# Altium PCB food_box_board.PcbDoc (part 2 of 2)
Units mil, origin at the board's own origin, x right, y up, seen from the top; angles counter-clockwise.
Board outline 2685 x 2040 mil, 4 copper layers (Top Layer, Int1 (GND), Int2 (PWR), Bottom Layer), stack 53.912 mil thick; 76 components, 56 nets, 292 pads, 52 vias.
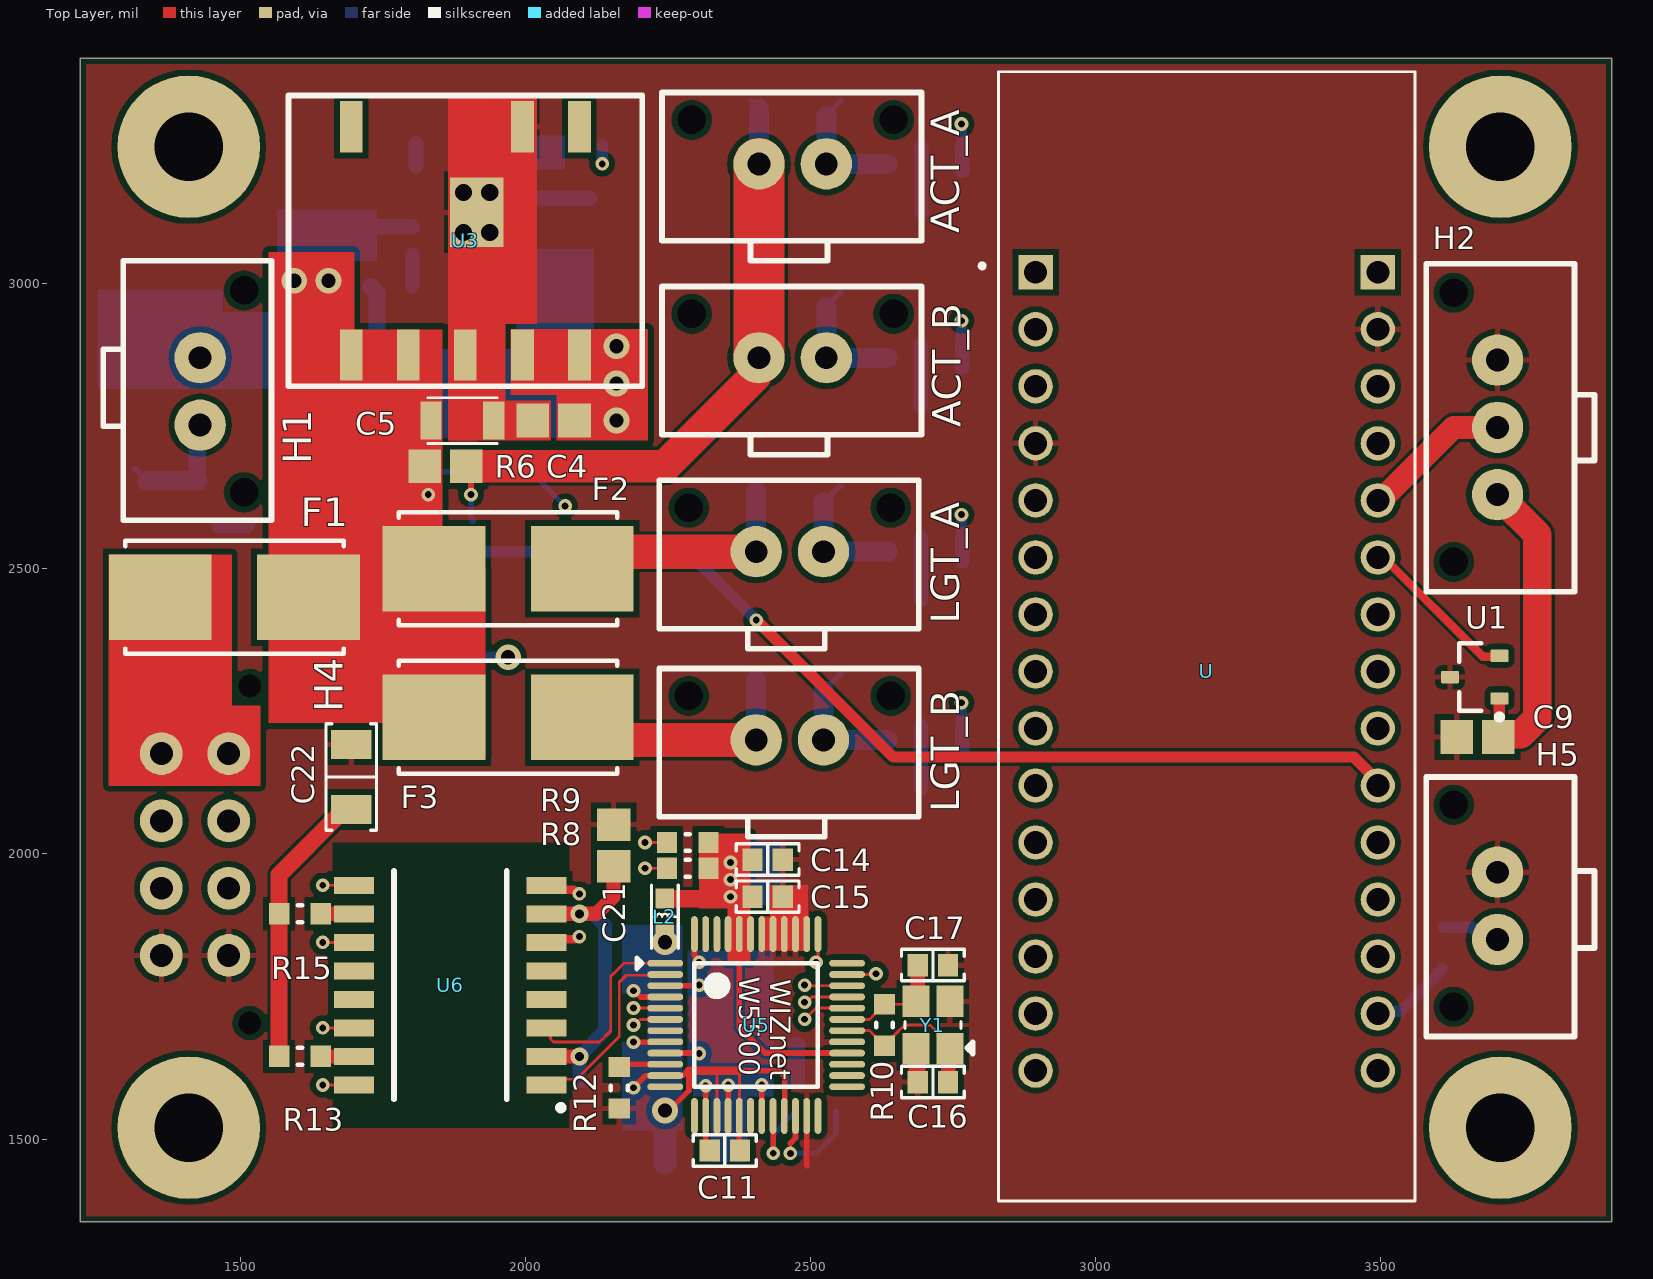
[diagram p0: Top Layer view]

## Part data (continued)
R2: "RES SMD 25.5K OHM 1% 1/10W 0603", Case Code (Imperial)=0603, Case Code (Metric)=1608, Manufacturer=Vishay, Manufacturer Part Number=CRCW060325K5FKEA, Max Operating Temperature=155°C, Max Power Dissipation=100mW, Min Operating Temperature=-55°C, Package Quantity=10, Resistance=25.5k, Supplier Part Number 1=541-25.5KHCT-ND, Temperature Coefficient=100ppm/°C, Tolerance=1%, Voltage Rating=75V, Case/Package=0603, Category="Chip SMD Resistors", ComponentLink1Description=https://datasheet.ciiva.com/11810/0900766b80d98afc-11810483.pdf?src-supplier=RSComponents, ComponentLink1URL=https://datasheet.ciiva.com/11810/0900766b80d98afc-11810483.pdf?src-supplier=RSComponents, ComponentLink2Description=https://datasheet.ciiva.com/2465/dcrcwe3-2465664.pdf?src-supplier=Digi-Key, ComponentLink2URL=https://datasheet.ciiva.com/2465/dcrcwe3-2465664.pdf?src-supplier=Digi-Key, ComponentLink3Description=https://datasheet.ciiva.com/2465/dcrcwe3-2465665.pdf?src-supplier=Digi-Key, ComponentLink3URL=https://datasheet.ciiva.com/2465/dcrcwe3-2465665.pdf?src-supplier=Digi-Key, ComponentLink4Description=https://datasheet.ciiva.com/3257/dcrcwe3-3257318.pdf?src-supplier=Avnet, ComponentLink4URL=https://datasheet.ciiva.com/3257/dcrcwe3-3257318.pdf?src-supplier=Avnet, ComponentLink5Description=https://datasheet.ciiva.com/3257/dcrcwe3-3257319.pdf?src-supplier=Avnet, ComponentLink5URL=https://datasheet.ciiva.com/3257/dcrcwe3-3257319.pdf?src-supplier=Avnet, ComponentLink6Description=https://datasheet.ciiva.com/16202/dcrcwe3-16202503.pdf?src-supplier=Future+Electronics, ComponentLink6URL=https://datasheet.ciiva.com/16202/dcrcwe3-16202503.pdf?src-supplier=Future+Electronics, ComponentLink7Description=https://datasheet.ciiva.com/7173/1635184-7173016.pdf?src-supplier=Newark, ComponentLink7URL=https://datasheet.ciiva.com/7173/1635184-7173016.pdf?src-supplier=Newark, ComponentLink8Description=https://datasheet.ciiva.com/16882/dcrcwe3-16882729.pdf?src-supplier=Avnet+Europe, ComponentLink8URL=https://datasheet.ciiva.com/16882/dcrcwe3-16882729.pdf?src-supplier=Avnet+Europe, ComponentLink9Description=https://datasheet.ciiva.com/22675/1847332-22675962.pdf?src-supplier=Element14, ComponentLink9URL=https://datasheet.ciiva.com/22675/1847332-22675962.pdf?src-supplier=Element14, ComponentLink10Description=https://datasheet.ciiva.com/22702/1697337-22702891.pdf?src-supplier=Element14, ComponentLink10URL=https://datasheet.ciiva.com/22702/1697337-22702891.pdf?src-supplier=Element14, ComponentLink11Description=https://datasheet.ciiva.com/22869/70201119-22869452.pdf?src-supplier=Allied+Electronics, ComponentLink11URL=https://datasheet.ciiva.com/22869/70201119-22869452.pdf?src-supplier=Allied+Electronics, ComponentLink12Description=https://datasheet.ciiva.com/2465/dcrcwe3-2465663.pdf?src-supplier=Digi-Key, ComponentLink12URL=https://datasheet.ciiva.com/2465/dcrcwe3-2465663.pdf?src-supplier=Digi-Key, ComponentLink13Description=https://datasheet.ciiva.com/5541/dcrcwe3-109170-5541965.pdf?src-supplier=Mouser, ComponentLink13URL=https://datasheet.ciiva.com/5541/dcrcwe3-109170-5541965.pdf?src-supplier=Mouser, Composition="Thick Film", Contact Plating=Tin, Depth=0.85mm, Features="Automotive AEC-Q200", Height=0.45mm, Lead Free="Lead Free", Length=1.55mm, Military Standard=Not, Number of Pins=2, Number of Terminations=2, Packaging="Tape and Reel", Power Rating=100mW, Pricing 1="1=0.10000, 10=0.03400, 100=0.01390, 1000=0.00623, 2500=0.00540 (USD)", Radiation Hardening=No, REACH SVHC=Unknown, Supplier 1=Digi-Key, Termination=SMD/SMT, Voltage Rating (DC)=75V, Weight=7.1E-05oz, Width=0.033inch, Working Voltage=75V
R3: "Res Thick Film 0603 13K Ohm 1% 1/10W 100ppm/C Molded SMD SMD Paper T/R", Case Code (Imperial)=0603, Case Code (Metric)=1608, Manufacturer="Vishay Dale", Manufacturer Part Number=CRCW060313K0FKTA, Max Operating Temperature=155°C, Max Power Dissipation=100mW, Min Operating Temperature=-55°C, Package Quantity=5000, Resistance=13k, Supplier Part Number 1=541-CRCW060313K0FKTACT-ND, Temperature Coefficient=100ppm/°C, Tolerance=1%, Voltage Rating=75V, Case/Package=0603, Category="Chip SMD Resistors", ComponentLink1Description=https://datasheet.ciiva.com/15159/getdatasheetpartid-33120-15159398.pdf?src-supplier=Verical, ComponentLink1URL=https://datasheet.ciiva.com/15159/getdatasheetpartid-33120-15159398.pdf?src-supplier=Verical, ComponentLink2Description=https://datasheet.ciiva.com/2564/dcrcw-2564949.pdf?src-supplier=Digi-Key, ComponentLink2URL=https://datasheet.ciiva.com/2564/dcrcw-2564949.pdf?src-supplier=Digi-Key, ComponentLink3Description=https://datasheet.ciiva.com/9043/dcrcw-9043261.pdf?src-supplier=Avnet, ComponentLink3URL=https://datasheet.ciiva.com/9043/dcrcw-9043261.pdf?src-supplier=Avnet, Composition="Thick Film", Contact Plating=Tin,Lead, Depth=0.85mm, Features="Automotive AEC-Q200", Height=0.02inch, Lead Free="Contains Lead", Length=1.55mm, Military Standard=Not, Number of Pins=2, Number of Terminations=2, Packaging="Tape and Reel", Power Dissipation=100mW, Power Rating=100mW, Pricing 1="1=0.13000, 10=0.12000, 100=0.04620, 1000=0.02033, 2500=0.01756 (USD)", Radiation Hardening=No, REACH SVHC=Unknown, Supplier 1=Digi-Key, Voltage Rating (DC)=75V, Weight=7.1E-05oz, Width=0.85mm
R4 "R11_Box Actuator A" "R11_Box Actuator B" "R11_Light A" "R11_Light B": library part "RES 0603", "CRGCQ 0603 100R 5%", Case Code (Imperial)=0603, Case Code (Metric)=1608, Manufacturer="TE Connectivity", Manufacturer Part Number=CRGCQ0603J100R, Max Operating Temperature=155°C, Max Power Dissipation=100mW, Min Operating Temperature=-55°C, Resistance=100R, Supplier Part Number 1=A130085CT-ND, Temperature Coefficient=100ppm/°C, Tolerance=5%, Case/Package=0603, Category="Chip SMD Resistors", ComponentLink1Description=https://www.te.com/commerce/DocumentDelivery/DDEController?Action=srchrtrv&amp;DocNm=1773204-3&amp;DocType=DS&amp;DocLang=English&src-supplier=Digi-Key, ComponentLink1URL=https://www.te.com/commerce/DocumentDelivery/DDEController?Action=srchrtrv&amp;DocNm=1773204-3&amp;DocType=DS&amp;DocLang=English&src-supplier=Digi-Key, Composition="Thick Film", Features="Moisture Resistant,Automotive AEC-Q200", Number of Terminations=2, Packaging="Cut Tape", Pricing 1="1=0.10000, 10=0.02100, 100=0.00860, 1000=0.00387, 2500=0.00336 (USD)", Supplier 1=Digi-Key
R5 "R14_Box Actuator A" "R14_Box Actuator B" "R14_Light A" "R14_Light B": library part "RES 0603", "TE CONNECTIVITY - CRGCQ0603J10K - RES, 10K, 5%, 0603, THICK FILM", Case Code (Imperial)=0603, Case Code (Metric)=1608, Manufacturer="TE Connectivity", Manufacturer Part Number=CRGCQ0603J10K, Max Operating Temperature=155°C, Max Power Dissipation=100mW, Min Operating Temperature=-55°C, Resistance=10kR, Supplier Part Number 1=A130097CT-ND, Temperature Coefficient=100ppm/°C, Tolerance=5%, Case/Package=0603, Category="Chip SMD Resistors", ComponentLink1Description=https://4donline.ihs.com/images/VipMasterIC/IC/TYEL/TYEL-S-A0004929575/TYEL-S-A0004929575-1.pdf?hkey=52A5661711E402568146F3353EA87419&src-supplier=Farnell, ComponentLink1URL=https://4donline.ihs.com/images/VipMasterIC/IC/TYEL/TYEL-S-A0004929575/TYEL-S-A0004929575-1.pdf?hkey=52A5661711E402568146F3353EA87419&src-supplier=Farnell, ComponentLink2Description=https://4donline.ihs.com/images/VipMasterIC/IC/TYEL/TYEL-S-A0004929575/TYEL-S-A0004929575-1.pdf?hkey=52A5661711E402568146F3353EA87419&src-supplier=Newark, ComponentLink2URL=https://4donline.ihs.com/images/VipMasterIC/IC/TYEL/TYEL-S-A0004929575/TYEL-S-A0004929575-1.pdf?hkey=52A5661711E402568146F3353EA87419&src-supplier=Newark, ComponentLink3Description=https://www.te.com/commerce/DocumentDelivery/DDEController?Action=srchrtrv&amp;DocNm=1773204-3&amp;DocType=DS&amp;DocLang=English&src-supplier=Digi-Key, ComponentLink3URL=https://www.te.com/commerce/DocumentDelivery/DDEController?Action=srchrtrv&amp;DocNm=1773204-3&amp;DocType=DS&amp;DocLang=English&src-supplier=Digi-Key, ComponentLink4Description=http://www.te.com/commerce/DocumentDelivery/DDEController?Action=srchrtrv&DocNm=1773204-3&DocType=DS&DocLang=English&src-supplier=Digi-Key, ComponentLink4URL=http://www.te.com/commerce/DocumentDelivery/DDEController?Action=srchrtrv&DocNm=1773204-3&DocType=DS&DocLang=English&src-supplier=Digi-Key, Composition="Thick Film", Features="Moisture Resistant,Automotive AEC-Q200", Number of Terminations=2, Packaging="Tape and Reel", Pricing 1="1=0.10000, 10=0.02100, 100=0.00860, 1000=0.00387, 2500=0.00336 (USD)", Supplier 1=Digi-Key
R6: library part "RES 0603", "Resistor Thick Film 0.01Ohm 0.5% 0.5W 2-Pin 0805 T/R", Manufacturer=Panasonic, Manufacturer Part Number=ERJ-6CWDR010V, Supplier Part Number 1=P124401CT-ND, Pricing 1="1=0.65000, 10=0.48100, 25=0.39000, 50=0.33920, 100=0.27990, 250=0.24312, 500=0.19790, 1000=0.15696 (USD)", Supplier 1=Digi-Key
R7: library part "RES 0603", "CRGCQ 0603 100K 5%", Case Code (Imperial)=0603, Case Code (Metric)=1608, Manufacturer="TE Connectivity", Manufacturer Part Number=CRGCQ0603J100K, Max Operating Temperature=155°C, Max Power Dissipation=100mW, Min Operating Temperature=-55°C, Resistance=100k, Supplier Part Number 1=A130103CT-ND, Temperature Coefficient=100ppm/°C, Tolerance=5%, Case/Package=0603, Category="Chip SMD Resistors", ComponentLink1Description=https://www.te.com/commerce/DocumentDelivery/DDEController?Action=srchrtrv&amp;DocNm=1773204-3&amp;DocType=DS&amp;DocLang=English&src-supplier=Digi-Key, ComponentLink1URL=https://www.te.com/commerce/DocumentDelivery/DDEController?Action=srchrtrv&amp;DocNm=1773204-3&amp;DocType=DS&amp;DocLang=English&src-supplier=Digi-Key, ComponentLink2Description=https://4donline.ihs.com/images/VipMasterIC/IC/TYEL/TYEL-S-A0004929575/TYEL-S-A0004929575-1.pdf?hkey=52A5661711E402568146F3353EA87419&src-supplier=Farnell, ComponentLink2URL=https://4donline.ihs.com/images/VipMasterIC/IC/TYEL/TYEL-S-A0004929575/TYEL-S-A0004929575-1.pdf?hkey=52A5661711E402568146F3353EA87419&src-supplier=Farnell, ComponentLink3Description=https://4donline.ihs.com/images/VipMasterIC/IC/TYEL/TYEL-S-A0004929575/TYEL-S-A0004929575-1.pdf?hkey=52A5661711E402568146F3353EA87419&src-supplier=Newark, ComponentLink3URL=https://4donline.ihs.com/images/VipMasterIC/IC/TYEL/TYEL-S-A0004929575/TYEL-S-A0004929575-1.pdf?hkey=52A5661711E402568146F3353EA87419&src-supplier=Newark, ComponentLink4Description=https://4donline.ihs.com/images/VipMasterIC/IC/TYEL/TYEL-S-A0004929575/TYEL-S-A0004929575-1.pdf?hkey=52A5661711E402568146F3353EA87419&src-supplier=Element14, ComponentLink4URL=https://4donline.ihs.com/images/VipMasterIC/IC/TYEL/TYEL-S-A0004929575/TYEL-S-A0004929575-1.pdf?hkey=52A5661711E402568146F3353EA87419&src-supplier=Element14, Composition="Thick Film", Features="Moisture Resistant,Automotive AEC-Q200", Number of Terminations=2, Packaging="Tape and Reel", Pricing 1="1=0.10000, 10=0.02100, 100=0.00860, 1000=0.00387, 2500=0.00336 (USD)", Supplier 1=Digi-Key
R8 R9: library part "RES 0603", "SMD Resistor, Thick film 4.7 kOhm,  ±  1 %, 0603, CRCW06034K70FKEA, Vishay", Case Code (Imperial)=0603, Case Code (Metric)=1608, Manufacturer=Vishay, Manufacturer Part Number=CRCW06034K70FKEA, Max Operating Temperature=155°C, Min Operating Temperature=-55°C, Package Quantity=5000, Power Rating=100mW, Resistance=4.7kR, Supplier Part Number 1=541-4.70KHCT-ND, Temperature Coefficient=100ppm/°C, Tolerance=1%, Voltage Rating=75V, Case/Package=0603, Category="Chip SMD Resistors", ComponentLink1Description=https://datasheet.ciiva.com/11809/0900766b80d98afc-11809859.pdf?src-supplier=RSComponents, ComponentLink1URL=https://datasheet.ciiva.com/11809/0900766b80d98afc-11809859.pdf?src-supplier=RSComponents, ComponentLink2Description=https://datasheet.ciiva.com/16520/dcrcwe3-16520616.pdf?src-supplier=Avnet+Asia, ComponentLink2URL=https://datasheet.ciiva.com/16520/dcrcwe3-16520616.pdf?src-supplier=Avnet+Asia, ComponentLink3Description=https://datasheet.ciiva.com/8079/1697337-8079646.pdf?src-supplier=Element14, ComponentLink3URL=https://datasheet.ciiva.com/8079/1697337-8079646.pdf?src-supplier=Element14, ComponentLink4Description=https://datasheet.ciiva.com/26314/fld-crcw-e3-data-en-26314735.pdf?src-supplier=Distrelec, ComponentLink4URL=https://datasheet.ciiva.com/26314/fld-crcw-e3-data-en-26314735.pdf?src-supplier=Distrelec, ComponentLink5Description=https://datasheet.ciiva.com/15159/getdatasheetpartid-33073-15159382.pdf?src-supplier=Verical, ComponentLink5URL=https://datasheet.ciiva.com/15159/getdatasheetpartid-33073-15159382.pdf?src-supplier=Verical, ComponentLink6Description=https://datasheet.ciiva.com/16199/dcrcwe3-16199366.pdf?src-supplier=Future+Electronics, ComponentLink6URL=https://datasheet.ciiva.com/16199/dcrcwe3-16199366.pdf?src-supplier=Future+Electronics, ComponentLink7Description=https://datasheet.ciiva.com/16764/70201119-16764918.pdf?src-supplier=Allied+Electronics, ComponentLink7URL=https://datasheet.ciiva.com/16764/70201119-16764918.pdf?src-supplier=Allied+Electronics, ComponentLink8Description=https://datasheet.ciiva.com/16724/70201119-16724106.pdf?src-supplier=Allied+Electronics, ComponentLink8URL=https://datasheet.ciiva.com/16724/70201119-16724106.pdf?src-supplier=Allied+Electronics, Composition="Thick Film", Contact Plating=Tin, Depth=0.85mm, Height=0.45mm, Lead Free="Lead Free", Length=1.55mm, Military Standard=Not, Mount="Surface Mount", Packaging="Tape and Reel", REACH SVHC=Unknown, Supplier 1=Digi-Key, Termination=SMD/SMT, Voltage Rating (DC)=75V, Weight=7.1E-05oz, Width=0.85mm
R10: library part "RES 0603", "Thick Film Chip Resistor", Case Code (Imperial)=0603, Case Code (Metric)=1608, Manufacturer=Vishay, Manufacturer Part Number=CRCW06031M00FKEA, Max Operating Temperature=155°C, Max Power Dissipation=100mW, Min Operating Temperature=-55°C, Package Quantity=10, Resistance=1MR, Supplier Part Number 1=541-1.00MHCT-ND, Temperature Coefficient=100ppm/°C, Tolerance=1%, Voltage Rating=75V, Case/Package=0603, Category="Chip SMD Resistors", ComponentLink1Description=https://datasheet.ciiva.com/11809/0900766b80d98afc-11809074.pdf?src-supplier=RSComponents, ComponentLink1URL=https://datasheet.ciiva.com/11809/0900766b80d98afc-11809074.pdf?src-supplier=RSComponents, ComponentLink2Description=https://datasheet.ciiva.com/2465/dcrcwe3-2465549.pdf?src-supplier=Digi-Key, ComponentLink2URL=https://datasheet.ciiva.com/2465/dcrcwe3-2465549.pdf?src-supplier=Digi-Key, ComponentLink3Description=https://datasheet.ciiva.com/16311/dcrcwe3-16311533.pdf?src-supplier=Future+Electronics, ComponentLink3URL=https://datasheet.ciiva.com/16311/dcrcwe3-16311533.pdf?src-supplier=Future+Electronics, ComponentLink4Description=https://datasheet.ciiva.com/2465/dcrcwe3-2465550.pdf?src-supplier=Digi-Key, ComponentLink4URL=https://datasheet.ciiva.com/2465/dcrcwe3-2465550.pdf?src-supplier=Digi-Key, ComponentLink5Description=https://datasheet.ciiva.com/26314/fld-crcw-e3-data-en-26314645.pdf?src-supplier=Distrelec, ComponentLink5URL=https://datasheet.ciiva.com/26314/fld-crcw-e3-data-en-26314645.pdf?src-supplier=Distrelec, ComponentLink6Description=https://datasheet.ciiva.com/7841/1720486-7841822.pdf?src-supplier=Element14, ComponentLink6URL=https://datasheet.ciiva.com/7841/1720486-7841822.pdf?src-supplier=Element14, ComponentLink7Description=https://datasheet.ciiva.com/2465/dcrcwe3-2465551.pdf?src-supplier=Digi-Key, ComponentLink7URL=https://datasheet.ciiva.com/2465/dcrcwe3-2465551.pdf?src-supplier=Digi-Key, ComponentLink8Description=https://datasheet.ciiva.com/7841/125364-7841823.pdf?src-supplier=Element14, ComponentLink8URL=https://datasheet.ciiva.com/7841/125364-7841823.pdf?src-supplier=Element14, Composition="Thick Film", Contact Plating=Tin, Depth=0.85mm, Features="Automotive AEC-Q200", Height=0.45mm, Lead Free="Lead Free", Length=1.55mm, Military Standard=Not, Mount="Surface Mount", Number of Pins=2, Number of Terminations=2, Packaging="Tape and Reel", Power Rating=100mW, Radiation Hardening=No, REACH SVHC=Unknown, Supplier 1=Digi-Key, Termination=SMD/SMT, Voltage Rating (DC)=75V, Weight=7.1E-05oz, Width=0.85mm
R12: library part "RES 0603", "Res Thick Film 0603 12.4K Ohm 1% 1/10W ±100ppm/°C Molded SMD SMD Paper T/R", Case Code (Imperial)=0603, Case Code (Metric)=1608, Manufacturer=Vishay, Manufacturer Part Number=CRCW0603-12K4FKEA, Max Operating Temperature=155°C, Max Power Dissipation=100mW, Min Operating Temperature=-55°C, Package Quantity=10, Resistance=12.4kR, Supplier Part Number 1=541-12.4KHTR-ND, Temperature Coefficient=100ppm/°C, Tolerance=1%, Voltage Rating=75V, Case/Package=0603, Category="Chip SMD Resistors", ComponentLink1Description=https://datasheet.ciiva.com/11809/0900766b80d98afc-11809065.pdf?src-supplier=RSComponents, ComponentLink1URL=https://datasheet.ciiva.com/11809/0900766b80d98afc-11809065.pdf?src-supplier=RSComponents, ComponentLink2Description=https://datasheet.ciiva.com/16215/dcrcwe3-16215547.pdf?src-supplier=Future+Electronics, ComponentLink2URL=https://datasheet.ciiva.com/16215/dcrcwe3-16215547.pdf?src-supplier=Future+Electronics, ComponentLink3Description=https://datasheet.ciiva.com/16515/dcrcwe3-16515035.pdf?src-supplier=Avnet+Asia, ComponentLink3URL=https://datasheet.ciiva.com/16515/dcrcwe3-16515035.pdf?src-supplier=Avnet+Asia, ComponentLink4Description=https://datasheet.ciiva.com/2465/dcrcwe3-2465806.pdf?src-supplier=Digi-Key, ComponentLink4URL=https://datasheet.ciiva.com/2465/dcrcwe3-2465806.pdf?src-supplier=Digi-Key, ComponentLink5Description=https://datasheet.ciiva.com/16767/70201119-16767174.pdf?src-supplier=Allied+Electronics, ComponentLink5URL=https://datasheet.ciiva.com/16767/70201119-16767174.pdf?src-supplier=Allied+Electronics, ComponentLink6Description=https://datasheet.ciiva.com/5543/dcrcwe3-109170-5543127.pdf?src-supplier=Mouser, ComponentLink6URL=https://datasheet.ciiva.com/5543/dcrcwe3-109170-5543127.pdf?src-supplier=Mouser, ComponentLink7Description=https://datasheet.ciiva.com/16778/70201119-16778295.pdf?src-supplier=Allied+Electronics, ComponentLink7URL=https://datasheet.ciiva.com/16778/70201119-16778295.pdf?src-supplier=Allied+Electronics, ComponentLink8Description=https://datasheet.ciiva.com/3257/dcrcwe3-3257002.pdf?src-supplier=Avnet, ComponentLink8URL=https://datasheet.ciiva.com/3257/dcrcwe3-3257002.pdf?src-supplier=Avnet, ComponentLink9Description=https://datasheet.ciiva.com/2465/dcrcwe3-2465804.pdf?src-supplier=Digi-Key, ComponentLink9URL=https://datasheet.ciiva.com/2465/dcrcwe3-2465804.pdf?src-supplier=Digi-Key, ComponentLink10Description=https://datasheet.ciiva.com/2465/dcrcwe3-2465805.pdf?src-supplier=Digi-Key, ComponentLink10URL=https://datasheet.ciiva.com/2465/dcrcwe3-2465805.pdf?src-supplier=Digi-Key, Composition="Thick Film", Contact Plating=Tin, Depth=0.85mm, Features="Automotive AEC-Q200", Height=0.45mm, Lead Free="Lead Free", Length=1.55mm, Military Standard=Not, Mount="Surface Mount", Number of Pins=2, Number of Terminations=2, Packaging="Tape and Reel", Power Rating=100mW, Radiation Hardening=No, REACH SVHC=Unknown, Supplier 1=Digi-Key, Termination=SMD/SMT, Voltage Rating (DC)=75V, Weight=7.1E-05oz, Width=0.85mm
R13 R15: library part "RES 0603", "VISHAY - CRCW060375R0FKEA - RES, 75R, 1%, 0.1W, 0603, THICK FILM", Case Code (Imperial)=0603, Case Code (Metric)=1608, Manufacturer=Vishay, Manufacturer Part Number=CRCW060375R0FKEA, Max Operating Temperature=155°C, Min Operating Temperature=-55°C, Package Quantity=5000, Power Rating=100mW, Resistance=75R, Supplier Part Number 1=541-75.0HCT-ND, Temperature Coefficient=100ppm/°C, Tolerance=1%, Voltage Rating=75V, Case/Package=0603, Category="Chip SMD Resistors", ComponentLink1Description=https://datasheet.ciiva.com/11809/0900766b80d98afc-11809100.pdf?src-supplier=RSComponents, ComponentLink1URL=https://datasheet.ciiva.com/11809/0900766b80d98afc-11809100.pdf?src-supplier=RSComponents, ComponentLink2Description=https://datasheet.ciiva.com/7673/1697337-7673323.pdf?src-supplier=Element14, ComponentLink2URL=https://datasheet.ciiva.com/7673/1697337-7673323.pdf?src-supplier=Element14, ComponentLink3Description=https://datasheet.ciiva.com/16852/dcrcwe3-16852747.pdf?src-supplier=Avnet+Europe, ComponentLink3URL=https://datasheet.ciiva.com/16852/dcrcwe3-16852747.pdf?src-supplier=Avnet+Europe, ComponentLink4Description=https://datasheet.ciiva.com/3257/dcrcwe3-3257884.pdf?src-supplier=Avnet, ComponentLink4URL=https://datasheet.ciiva.com/3257/dcrcwe3-3257884.pdf?src-supplier=Avnet, ComponentLink5Description=https://datasheet.ciiva.com/3257/dcrcwe3-3257885.pdf?src-supplier=Avnet, ComponentLink5URL=https://datasheet.ciiva.com/3257/dcrcwe3-3257885.pdf?src-supplier=Avnet, ComponentLink6Description=https://datasheet.ciiva.com/16780/70201119-16780254.pdf?src-supplier=Allied+Electronics, ComponentLink6URL=https://datasheet.ciiva.com/16780/70201119-16780254.pdf?src-supplier=Allied+Electronics, ComponentLink7Description=https://datasheet.ciiva.com/5541/dcrcwe3-109170-5541910.pdf?src-supplier=Mouser, ComponentLink7URL=https://datasheet.ciiva.com/5541/dcrcwe3-109170-5541910.pdf?src-supplier=Mouser, ComponentLink8Description=https://datasheet.ciiva.com/16199/dcrcwe3-16199141.pdf?src-supplier=Future+Electronics, ComponentLink8URL=https://datasheet.ciiva.com/16199/dcrcwe3-16199141.pdf?src-supplier=Future+Electronics, ComponentLink9Description=https://datasheet.ciiva.com/16722/70201119-16722522.pdf?src-supplier=Allied+Electronics, ComponentLink9URL=https://datasheet.ciiva.com/16722/70201119-16722522.pdf?src-supplier=Allied+Electronics, ComponentLink10Description=https://datasheet.ciiva.com/7673/1697337-7673471.pdf?src-supplier=Element14, ComponentLink10URL=https://datasheet.ciiva.com/7673/1697337-7673471.pdf?src-supplier=Element14, Composition="Thick Film", Contact Plating=Tin, Depth=0.85mm, Height=0.45mm, Lead Free="Lead Free", Length=1.55mm, Military Standard=Not, Number of Terminations=2, Packaging="Tape and Reel", REACH SVHC=Unknown, Supplier 1=Digi-Key, Termination=SMD/SMT, Voltage Rating (DC)=75V, Weight=7.1E-05oz, Width=0.85mm, Working Voltage=75V
U: "STM32L432KC, mbed-Enabled Development Nucleo-32 STM32L4 ARMÂ® CortexÂ®-M4 MCU 32-Bit Embedded Evaluation Board", Package=None, Availability=Unavailable, MF=STMicroelectronics, MP=NUCLEO-L432KC, Price=None, SnapEDA_Link=https://www.snapeda.com/parts/NUCLEO-L432KC/STMicroelectronics/view-part/628463/?ref=snap
U1: library part CMP-0066-00260-3, "2.7V Temperature Sensor, 3-pin SOT-23, Pb-Free", Manufacturer="Texas Instruments", PackageTopMarking=T1C*XTT, PowerWise=N, ComponentLink1Description="Datasheet URL", ComponentLink1URL=http://www.ti.com/general/docs/lit/getliterature.tsp?genericPartNumber=LM61&fileType=pdf, CompType="Temp Sensor IC", PackageDescription="Molded SOT-23, .115 x .051 x .037in Body, 3 Lead, .075 in Pitch", PackageReference=DBZ0003A, PinCount=3, RoHS=Y
U5: "WIZnet W5500"
Y1: library part OSC-82J0626-25MHz, "CRYSTAL 25.0000MHZ 18PF SMD", Case/Package=SMD/SMT, ESR (Equivalent Series Resistance)=50R, Frequency Stability=30ppm, Frequency Tolerance=50ppm, Load Capacitance=18pF, Manufacturer=Epson, Manufacturer Part Number=FA-23825.0000MB-C3, Max Operating Temperature=70°C, Min Operating Temperature=-20°C, Package Quantity=250, Supplier Part Number 1=SER3691CT-ND, Category=Crystals, ComponentLink1Description=http://www.mouser.com/ds/2/137/A-238_en-932914.pdf?src-supplier=Mouser, ComponentLink1URL=http://www.mouser.com/ds/2/137/A-238_en-932914.pdf?src-supplier=Mouser, ComponentLink2Description=https://www5.epsondevice.com/en/information/support/pdf/june_2018_psc_masterbook.pdf?src-supplier=Digi-Key, ComponentLink2URL=https://www5.epsondevice.com/en/information/support/pdf/june_2018_psc_masterbook.pdf?src-supplier=Digi-Key, Frequency=25MHz, Height=0.028inch, Lead Free="Lead Free", Length=0.126inch, Mount="Surface Mount", Packaging="Tape and Reel", Supplier 1=Digi-Key, Termination=SMD/SMT, Tolerance=50ppm, Weight=0.000564oz, Width=0.098inch

## Free pads (board coordinates)
  round 250 hole 120: 0(1410,1520) 0(1410,3240) 0(3710,1520) 0(3710,3240)

## Via types
v1: diameter 24, hole 12, Top Layer to Bottom Layer, 38 vias
v2: diameter 45, hole 25, Top Layer to Bottom Layer, 8 vias
v3: diameter 30, hole 30, Top Layer to Bottom Layer, 4 vias
v4: diameter 32, hole 16, Top Layer to Bottom Layer, 2 vias

## Nets (pads, with @x,y where several pads share a name; then routed paths per layer and width w, separated by ;. In a path a pad name is that pad's centre, name@x,y a point inside that pad or via, vN(x,y) a via of type N, cw(c..) or ccw(c..) an arc to the next point about the centre after c; other vN are vias at no path point)
3V3: C4.2 C9.2 C10.2 C13.1 C14.2 C15.2 H2.1 L2.2 R7.2 R8.2 R9.2 U1.1 U3.4 U4.3 U5.28 U5.43 U5.44 U5.45 U.CN4_14 | length 1499.8
  Top Layer w5: C9.2 C9.2@3708.31,2203.11
  Top Layer w10: 2331.5,1921.5 2335,1925 ; U5.44 2375.47,1696.1 2420.79,1650.79 U5.28
  Top Layer w20: C9.2@3708.31,2205 U1.1
  Top Layer w30: L2.2 2331.5,1921.5
  Top Layer w50: H2.1 3775,2560 3775,2238.82 3745.71,2209.53 3709.96,2209.53 3708.31,2207.87 C9.2@3708.31,2205
  Bottom Layer w5: R7.2@3601.41,1790.97 3609.02,1798.58 R7.2
  Bottom Layer w20: U4.3 1832.6,2382.4 1870,2345 v2(1970,2345) ; 2370,2005 2425,2005 ; U.CN4_14 3499.3,1724.3 3535.72,1724.3 3601.3,1789.88 3601.3,1790.87 R7.2@3609.02,1798.58
  other v1: 2360,1925 2360,1955 2360,1985
  other v2: 2160,2760 2160,2825 2160,2890
3V3_A: C11.2 C12.1 L2.1 U5.4 U5.8 U5.11 U5.15 U5.17 U5.21 | length 879.7
  Top Layer w5: v1(2190,1760) v1@2191.64,1760 ; U5.11@2245.34,1611.21 U5.11 ; 2331.02,1620 2336.1,1614.92 U5.15 ; 2375,1620 2375.47,1619.53 U5.17 ; C11.2@2375.47,1481.1 C11.2
  Top Layer w10: v1(2190,1590) 2211.21,1611.21 U5.11@2245.34,1611.21 ; v1(2190,1670) 2245.08,1670 U5.8 ; v1@2191.64,1760 2202.43,1749.21 U5.4 ; v2(2245,1550) 2251.9,1550 2287.05,1585.14 2287.05,1622.05 2276.76,1611.76 2245.9,1611.76 U5.11 ; 2375,1620 2445,1620 2455,1610 2455,1568.21 2454.56,1567.77 2454.56,1540.9 U5.21 ; C11.2@2375.47,1481.1 U5.17
  Top Layer w15: 2287.05,1620 2331.02,1620 2375,1620
  Bottom Layer w5: C12.1 C12.1@2245,1457.48
  Bottom Layer w40: C12.1@2245,1457.48 v2(2245,1550)
  other v2: 2245,1845
6V: C6.2 C7.2 D2.2 H1.1 L1.2 R1.2 | length 1009.1
  Int1 (GND) w25: H1.1 1980,2870 2135,3025 v1(2135,3210)
  Bottom Layer w10: L1.2 L1.2@1567.75,2816.75 ; R1.2@2135,3243.58 R1.2
  Bottom Layer w20: v1(2135,3210) R1.2@2135,3243.58
  Bottom Layer w40: H1.1 H1.1@1443.53,2870
24V: C2.2 C3.2 C5.2 F1.2 F2.1 F3.1 R6.2 U2.2 U3.3 U4.4 | length 230.6
  Bottom Layer w10: C3.2 C3.2@1620.12,3100 ; v1(1830,2630) 1830,2584.96 U4.4
  Bottom Layer w27: C3.2@1620.12,3100 U2.2
  other v2: 1595,3005 1655,3005
AGND: C11.1 C12.2 L3.1 U5.3 U5.9 U5.14 U5.16 U5.19 U5.48 | length 397.4
  Top Layer w5: v1@2303.9,1768.9 v1(2305,1770) ; v1@2304.21,1650.79 v1(2305,1650) ; v1(2305,1810) v1@2305,1813.44 ; C11.1@2316.42,1487.01 C11.1
  Top Layer w10: U5.9 v1@2304.21,1650.79 ; U5.3 v1@2303.9,1768.9 ; U5.48 2296.73,1821.71 v1@2305,1813.44 ; C11.1@2316.42,1487.01 U5.14 v1(2316.42,1593.58) ; U5.16 2355.79,1594.21 2355.97,1594.4 v1(2355.97,1594.57) ; U5.19 v1(2414.84,1594.84)
CHP_RX_N: U5.5 U6.8 | length 358.8
  Top Layer w5: v1(2190,1730) 2245.08,1730 U5.5
  Top Layer w15: U6.8 2045,1937.5 2085.06,1937.5 2092.56,1930 v1(2095,1930)
  Int1 (GND) w5: v1(2095,1930) 2140,1885 2140,1781.21 2190,1731.21 v1(2190,1730)
CHP_RX_P: U5.6 U6.6 | length 355.5
  Top Layer w5: v1(2190,1700) 2192.43,1700 2202.43,1710 2245.39,1710 U5.6
  Top Layer w15: U6.6 2042.84,1850.34 2087.91,1850.34 2092.56,1855 v1(2095,1855)
  Int1 (GND) w5: v1(2095,1855) 2095,1861.57 2103.43,1870 2120,1870 2125,1865 2125,1775 2170,1730 2170,1720 v1(2190,1700)
CHP_TX_N: U5.1 U6.3 | length 338.7
  Top Layer w5: U6.3 2044.57,1687.93 2044.57,1675.43 2050,1670 2130,1670 2150,1690 2150,1785 2173.27,1808.27 U5.1
CHP_TX_P: U5.2 U6.1 | length 343.9
  Top Layer w5: U6.1 2047.5,1605 2090,1605 2165,1680 2165,1775 2177.29,1787.29 2244.26,1787.29 U5.2
CS: R8.1 U5.32 U.CN3_13 | length 961.8
  Top Layer w5: v1(2210,1975) R8.1 ; v1(2490,1710) 2510,1730 2563.98,1730 U5.32
  Int1 (GND) w5: v1@2488.71,1711.29 v1(2490,1710)
  Int1 (GND) w10: v1(2210,1975) 2473.71,1711.29 v1@2488.71,1711.29
  Int2 (PWR) w10: v1(2490,1710) 2785,1710 U.CN3_13
ETH_RX_N: H4.3 U6.9 | length 384.8
  Top Layer w5: v1(1645,1945) U6.9
  Int2 (PWR) w5: H4.3 1425,1995 1595,1995 v1(1645,1945)
ETH_RX_P: H4.2 U6.11 | length 387.3
  Top Layer w5: v1(1645,1845) U6.11
  Int2 (PWR) w5: H4.2 1362,1923 1405,1880 1610,1880 v1(1645,1845)
ETH_TX_N: H4.7 U6.14 | length 486.3
  Top Layer w5: v1(1645,1695) U6.14
  Int1 (GND) w5: H4.7 1482,2056 1482,2013 1595,1900 1595,1746.21 1645,1696.21 v1(1645,1695)
ETH_TX_P: H4.6 U6.16 | length 488.8
  Top Layer w5: v1(1645,1595) U6.16
  Int1 (GND) w5: H4.6 1491.82,1928.18 1521.82,1928.18 1580,1870 1580,1740 1615,1705 1615,1620 1640,1595 v1(1645,1595)
FB: R1.1 R3.2 U2.5
GND: "Q4_Box Actuator A.3" "Q4_Box Actuator B.3" "Q4_Light A.3" "Q4_Light B.3" "R14_Box Actuator A.1" "R14_Box Actuator B.1" "R14_Light A.1" "R14_Light B.1" C2.1 C3.1 C4.1 C5.1 C6.1 C7.1 C8.1 C9.1 C10.1 C13.2 C14.1 C15.1 C16.1 C17.1 C18.1 C19.1 C20.1 C21.1 C22.1 D1.1 H2.3 H4.1 H4.5 H5.2 L3.2 Q1.3 R2.1 R3.1 R5.1 R12.1 U1.3 U2.7 U3.2 U4.1 U5.23 U5.29 U5.38 U5.39 U5.40 U5.41 U5.42 U.CN3_4 U.CN4_2 Y1.2 Y1.4 | length 211.1
  Top Layer w10: 2493.58,1453.58 U5.23
  Top Layer w30: Y1.4 2686.95,1657.18 2686.95,1601.48 C16.1
  Bottom Layer w30: C18.1 2475.75,1602.17 2475.75,1664.25 L3.2
  other v3: 1891.81,3090 1937.81,3090 1891.81,3160 1937.81,3160
MISO: U5.34 U.CN3_15 | length 542
  Top Layer w5: v1(2490,1770) 2491.1,1768.9 U5.34
  Int1 (GND) w10: v1(2490,1770) 2575,1770 2725,1620 U.CN3_15
MOSI: U5.35 U.CN3_14 | length 360.1
  Top Layer w5: U5.35 2613.58,1788.58 v1(2615,1790)
  Int1 (GND) w10: v1(2615,1790) 2685,1720 U.CN3_14
NetC1_1: C1.1 U2.1 | length 55.2
  Bottom Layer w10: C1.1 C1.1@1801.81,2995.39
  Bottom Layer w25: C1.1@1801.81,2995.39 U2.1
NetC1_2: C1.2 D1.2 L1.1 U2.8 | length 206.2
  Bottom Layer w30: C1.2 1740,2983.58 1740,2853.25 L1.1
NetC8_2: C8.2 U2.6 | length 85.4
  Bottom Layer w27: U2.6 C8.2
NetC18_2: C18.2 U5.20 | length 156.4
  Top Layer w10: U5.20 2434.9,1540.18 v1(2434.9,1475.1)
  Bottom Layer w10: v1(2434.9,1475.1) 2434.8,1475.2 2434.8,1508.38 2450.47,1524.06 2450.47,1525.04 2474.02,1548.58 C18.2@2475,1548.58
NetC19_2: C19.2 U5.22 | length 202.3
  Top Layer w5: v1(2465,1475) 2465,1492.81
  Top Layer w10: 2465,1492.81 2473.9,1501.71 U5.22
  Bottom Layer w10: v1(2465,1475) 2510,1475 2545,1510 C19.2@2545,1548.58
NetC20_2: C20.2 C21.2 U6.2 U6.7 | length 602.7
  Top Layer w5: C21.2@2153.58,1980 C21.2
  Top Layer w25: U6.2 v4(2095,1645) ; U6.7 v4(2095,1895) 2125,1895 2155,1925 C21.2
  Bottom Layer w5: C20.2@2095,1601.42 C20.2
  Bottom Layer w25: C20.2@2095,1601.42 v4(2095,1645) 2140,1690 2140,1875 2120,1895 v4(2095,1895)
NetC22_2: C22.2 R13.1 R15.1 | length 492.4
  Top Layer w30: R13.1 R15.1 1568.58,1963.58 1672.32,2067.32 1684.41,2067.32 C22.2
NetD2_1: D2.1 H1.2 Q1.1 | length 218.8
  Bottom Layer w10: D2.1 D2.1@1336.89,2654.37
  Bottom Layer w30: Q1.1 1425,2747 H1.2
  Bottom Layer w35: D2.1@1336.89,2654.37 Q1.1
"NetD5_Box Actuator A_1": "D5_Box Actuator A.1" "Q4_Box Actuator A.1" ACT_A.2 | length 234.5
  Bottom Layer w10: 2528,3294.26 2553.74,3320 ; 2635.63,3210 2640,3214.37
  Bottom Layer w35: 2528,3294.26 ACT_A.2 2635.63,3210
"NetD5_Box Actuator B_1": "D5_Box Actuator B.1" "Q4_Box Actuator B.1" ACT_B.2 | length 239.5
  Bottom Layer w10: 2528,2959.26 2553.74,2985 ; 2635.63,2870 2640,2874.37
  Bottom Layer w35: 2528,2959.26 ACT_B.2 2635.63,2870
"NetD5_Light A_1": "D5_Light A.1" "Q4_Light A.1" LGT_A.2 | length 247.9
  Bottom Layer w10: 2523,2616.54 2551.46,2645 2553.74,2645 ; 2635.63,2530 2640,2534.37
  Bottom Layer w35: 2523,2616.54 LGT_A.2 2635.63,2530
"NetD5_Light A_2": "D5_Light A.2" F2.2 LGT_A.1 | length 436
  Top Layer w5: F2.2 F2.2@2130,2530
  Top Layer w60: F2.2@2130,2530 LGT_A.1
  Bottom Layer w10: 2396.26,2645 2405,2636.26
  Bottom Layer w35: LGT_A.1 2405,2636.26
"NetD5_Light B_1": "D5_Light B.1" "Q4_Light B.1" LGT_B.2 | length 247.9
  Bottom Layer w10: 2523,2286.54 2551.46,2315 2553.74,2315 ; 2635.63,2200 2640,2204.37
  Bottom Layer w35: 2523,2286.54 LGT_B.2 2635.63,2200
"NetD5_Light B_2": "D5_Light B.2" F3.2 LGT_B.1 | length 440.2
  Top Layer w5: F3.2 F3.2@2140,2200
  Top Layer w60: F3.2@2140,2200 LGT_B.1
  Bottom Layer w10: 2396.26,2315 2405,2306.26
  Bottom Layer w35: LGT_B.1 2405,2306.26
NetF1_1: F1.1 H4.4 H4.8
NetH2_2: H2.2 U.CN4_5 | length 263
  Top Layer w40: U.CN4_5 3500,2620 3628,2748 H2.2
NetH5_1: H5.1 R7.1 U.CN3_5 | length 1358.8
  Int1 (GND) w10: U.CN3_5 2975,2620 3425,2170 3540,2170 3575,2135 3575,1920 3645,1850 H5.1
  Bottom Layer w20: R7.1 3660.58,1871.42 3682,1850 H5.1
NetQ1_2: Q1.2 R4.1 | length 51.4
  Bottom Layer w10: R4.1@1512.95,2575.63 R4.1
  Bottom Layer w25: Q1.2 R4.1@1512.95,2575.63
"NetQ4_Box Actuator A_2": "Q4_Box Actuator A.2" "R11_Box Actuator A.1" | length 115.6
  Bottom Layer w25: 2693.58,3240 2695,3238.58 2695,3125
"NetQ4_Box Actuator B_2": "Q4_Box Actuator B.2" "R11_Box Actuator B.1" | length 110
  Bottom Layer w25: 2693.58,2785 2693.58,2895
"NetQ4_Light A_2": "Q4_Light A.2" "R11_Light A.1" | length 110
  Bottom Layer w25: 2693.58,2445 2693.58,2555
"NetQ4_Light B_2": "Q4_Light B.2" "R11_Light B.1" | length 110
  Bottom Layer w25: 2693.58,2115 2693.58,2225
NetR2_2: R2.2 U2.4 | length 47.8
  Bottom Layer w10: U2.4 U2.4@1808.58,3206.77
  Bottom Layer w27: U2.4@1808.58,3206.77 R2.2
NetR4_2: R4.2 R5.2 U.CN3_7 | length 1452.6
  Int2 (PWR) w10: v1(2070,2610) 2230,2450 2485,2450 2515,2420 U.CN3_7
  Bottom Layer w10: R5.2@1633.58,2575 R5.2 1635.98,2576.42 1648.7,2589.13 1648.7,2591.1 1727.6,2670 2010,2670 v1(2070,2610)
  Bottom Layer w25: R4.2 R5.2@1633.58,2575
NetR9_1: R9.1 U5.37 | length 476.4
  Top Layer w5: v1(2210,2020) R9.1 ; v1(2510,1810) 2513.27,1813.27 U5.37
  Int1 (GND) w10: v1(2210,2020) 2420,1810 v1(2510,1810)
"NetR11_Box Actuator A_2": "R11_Box Actuator A.2" "R14_Box Actuator A.2" U.CN3_10 | length 1395.4
  Int1 (GND) w10: v1(2765,3280) 2815,3230 2815,2772.13 2730,2687.13 2730,2240 2850,2120 U.CN3_10
  Bottom Layer w5: 2765,3241.42 2766.42,3240
  Bottom Layer w10: 2765,3196.42 2766.42,3197.83
  Bottom Layer w20: 2765,3241.42 v1(2765,3280)
  Bottom Layer w25: 2766.42,3197.83 2766.42,3240
"NetR11_Box Actuator B_2": "R11_Box Actuator B.2" "R14_Box Actuator B.2" U.CN3_11 | length 1107.5
  Int1 (GND) w10: v1(2765,2935) 2700,2870 2700,2215 U.CN3_11
  Bottom Layer w5: 2765,2896.42 2766.42,2895
  Bottom Layer w10: 2765,2851.42 2766.42,2852.83
  Bottom Layer w20: 2765,2896.42 v1(2765,2935)
  Bottom Layer w25: 2766.42,2852.83 2766.42,2895
"NetR11_Light A_2": "R11_Light A.2" "R14_Light A.2" U.CN4_11 | length 1070.5
  Int1 (GND) w10: v1(2765,2595) 2765,2565 2860,2470 3045,2470 U.CN4_11
  Bottom Layer w5: 2765,2556.42 2766.42,2555
  Bottom Layer w10: 2765,2511.42 2766.42,2512.83
  Bottom Layer w20: 2765,2556.42 v1(2765,2595)
  Bottom Layer w25: 2766.42,2512.83 2766.42,2555
"NetR11_Light B_2": "R11_Light B.2" "R14_Light B.2" U.CN4_12 | length 957.7
  Int1 (GND) w10: v1(2765,2265) 2860,2170 3245,2170 U.CN4_12
  Bottom Layer w5: 2765,2226.42 2766.42,2225
  Bottom Layer w10: 2765,2181.42 2766.42,2182.83
  Bottom Layer w20: 2765,2226.42 v1(2765,2265)
  Bottom Layer w25: 2766.42,2182.83 2766.42,2225
NetR12_2: R12.2 U5.10 | length 82.5
  Top Layer w5: R12.2 R12.2@2169.68,1631.1
  Top Layer w10: R12.2@2169.68,1631.1 U5.10
NetR13_2: R13.2 U6.15 | length 58.6
  Top Layer w25: R13.2 U6.15
NetR15_2: R15.2 U6.10 | length 58.6
  Top Layer w25: R15.2 U6.10
NetU1_2: U1.2 U.CN4_6 | length 286.2
  Top Layer w15: U.CN4_6 3505,2520 3679.33,2345.67 3706.58,2345.67 U1.2
NetU4_2: U4.2 U.CN4_10 | length 1834.8
  Top Layer w20: v1(2405,2410) 2645,2170 3452.85,2170 3495,2127.85 U.CN4_10
  Bottom Layer w20: U4.2 1870,2505 1895,2530 2285,2530 v1(2405,2410)
SCLK: U5.33 U.CN4_15 | length 1191
  Top Layer w5: v1(2490,1740) 2493.22,1740 2502.43,1749.21 U5.33
  Int1 (GND) w10: v1(2490,1740) 2550,1740 2740,1550 3425,1550 U.CN4_15
VACT: "D5_Box Actuator A.2" "D5_Box Actuator B.2" ACT_A.1 ACT_B.1 R6.1 U4.5 | length 1287.7
  Top Layer w5: R6.1 R6.1@1905,2671.42
  Top Layer w10: v1(1905,2630) R6.1@1905,2671.42
  Top Layer w57: R6.1 2245,2680 2403.69,2838.69 2403.69,2863.69 ACT_B.1
  Top Layer w90: ACT_B.1 ACT_A.1
  Bottom Layer w10: v1(1905,2630) 1905,2589.96 1910,2584.96 U4.5 ; 2396.26,2985 2410,2971.26 ; 2396.26,3320 2410,3306.26
  Bottom Layer w35: ACT_B.1 2410,2971.26 ; ACT_A.1 2410,3306.26
XI: C16.2 R10.1 U5.30 Y1.1 | length 289.2
  Top Layer w5: U5.30 2603.43,1690.16 2613.8,1679.78 2613.8,1678.8 2629.02,1663.58 2630.98,1663.58 2646.2,1678.8 2646.2,1681.2 2665,1700 2710,1700 2723.41,1686.6 2723.41,1679.78 Y1.1 Y1.1@2741.57,1655.71
  Top Layer w25: C16.2 Y1.1@2741.57,1655.71
XO: C17.2 R10.2 U5.31 Y1.3 | length 199.5
  Top Layer w5: U5.31 2603.43,1709.84 2613.8,1720.22 2613.8,1721.2 2629.02,1736.42 R10.2 2680.55,1736.42 Y1.3 Y1.3@2688.43,1744.29
  Top Layer w25: Y1.3@2688.43,1744.29 C17.2
pads on no net: ACT_A.0 ACT_B.0 H1.0 H2.0 H4.0 H5.0 LGT_A.0 LGT_B.0 U2.3 U3.1 U3.5 U5.7 U5.12 U5.13 U5.18 U5.24 U5.25 U5.26 U5.27 U5.36 U5.46 U5.47 U6.4 U6.5 U6.12 U6.13 U.CN3_1 U.CN3_2 U.CN3_3 U.CN3_6 U.CN3_8 U.CN3_9 U.CN3_12 U.CN4_1 U.CN4_3 U.CN4_4 U.CN4_7 U.CN4_8 U.CN4_9 U.CN4_13

## Polygon pours and split planes (outlines as drawn)
GND on Top Layer "GND_L01_P006" (solid, remove dead copper, pour order 6): 1230,3385 1230,1365 3895,1365 3895,3385
no net on Top Layer "NONET_L01_P002" (solid, pour order 2): 2215,1830
GND on Bottom Layer "GND_L04_P007" (solid, remove dead copper, pour order 7): 1230,3385 1230,1365 3895,1365 3895,3385
no net on Bottom Layer "NONET_L04_P005" (solid, pour order 5): 1230,3385
3V3 on Int2 (PWR) "3V3_L03_P009" (solid, remove dead copper, pour order 9): 1230,1365 1230,3385 3895,3385 3895,1365
no net on Int2 (PWR) "NONET_L03_P008" (solid, pour order 8): 1220,3395

## Other copper
Top Layer:
  rectangle net 24V: 1550,2230 1855,2920
  region net GND: 2414.84,1830 2495,1830 2495,1945 2430,1945 2430,1890 2414.84,1890
  region net NetF1_1: 1270,2525 1270,2120 1535,2120 1535,2260 1485,2260 1485,2525
  region net 24V: 1550,2900 1550,3055 1700,3055 1700,2900
  region net GND: 2045,2725 1865,2725 1865,3325 2020,3325 2020,2930 1965,2930 1965,2795 2045,2795
  region net 3V3: 1975,2920 2215,2920 2215,2725 2055,2725 2055,2805 1975,2805
  region net 24V: 1755,2500 1930,2500 1930,2170 1755,2170
  region net 3V3: 2305,2035 2305,1905 2355,1905 2355,1810 2395,1810 2395,2035
Int1 (GND):
  pour cut-out: 1662.5,2020 2077.5,2020 2077.5,1520 1662.5,1520
Int2 (PWR):
  pour cut-out: 1662.5,2020 2077.5,2020 2077.5,1520 1662.5,1520
Bottom Layer:
  rectangle net AGND: 2325,1460 2390,1580
  rectangle net FB: 2010,3200 2070,3260
  rectangle net 6V: 1410,2815 1625,2950
  rectangle net 6V: 1250,2815 1470,2990
  region net 24V: 1685,2965 1685,3040 1740,3040 1740,3130 1565,3130 1565,2965
  region net 3V3: 2345,2030 2455,2030 2455,1910 2345,1910
  region net 3V3_A: 2275,1515 2170,1515 2170,1670 2215,1670 2215,1755 2170,1755 2170,1875 2275,1875
  region net AGND: 2285,1830 2435,1830 2435,1575 2295,1575 2295,1620 2285,1620
  region net NetC1_2: 1720,2885 1985,2885 1985,3060 2120,3060 2120,2730 1720,2730
  region: 1725,2875

## Silkscreen, mask and mechanical layers (free items; w line width, h text height)
Mechanical 1:
  lines w10: 1225,1360 3900,1360 3900,3390 1225,3390 1225,1360

## Dimensions
1225,3390 to 3900,3390 on Mechanical 1
3900,3390 to 3900,1360 on Mechanical 1

## Text inside footprints (layer, text, board x,y; h text height)
U5: Top Overlay "WIZnet" at 2430,1780 h36 r270